# Altium PCB 水表通用工装一版PCB.PcbDoc (part 1 of 2)
Units mm, origin at the board's own origin, x right, y up, seen from the top; angles counter-clockwise.
Board outline 56.13 x 113.41 mm, 2 copper layers (Top Layer, Bottom Layer); 164 components, 131 nets, 500 pads, 301 vias.
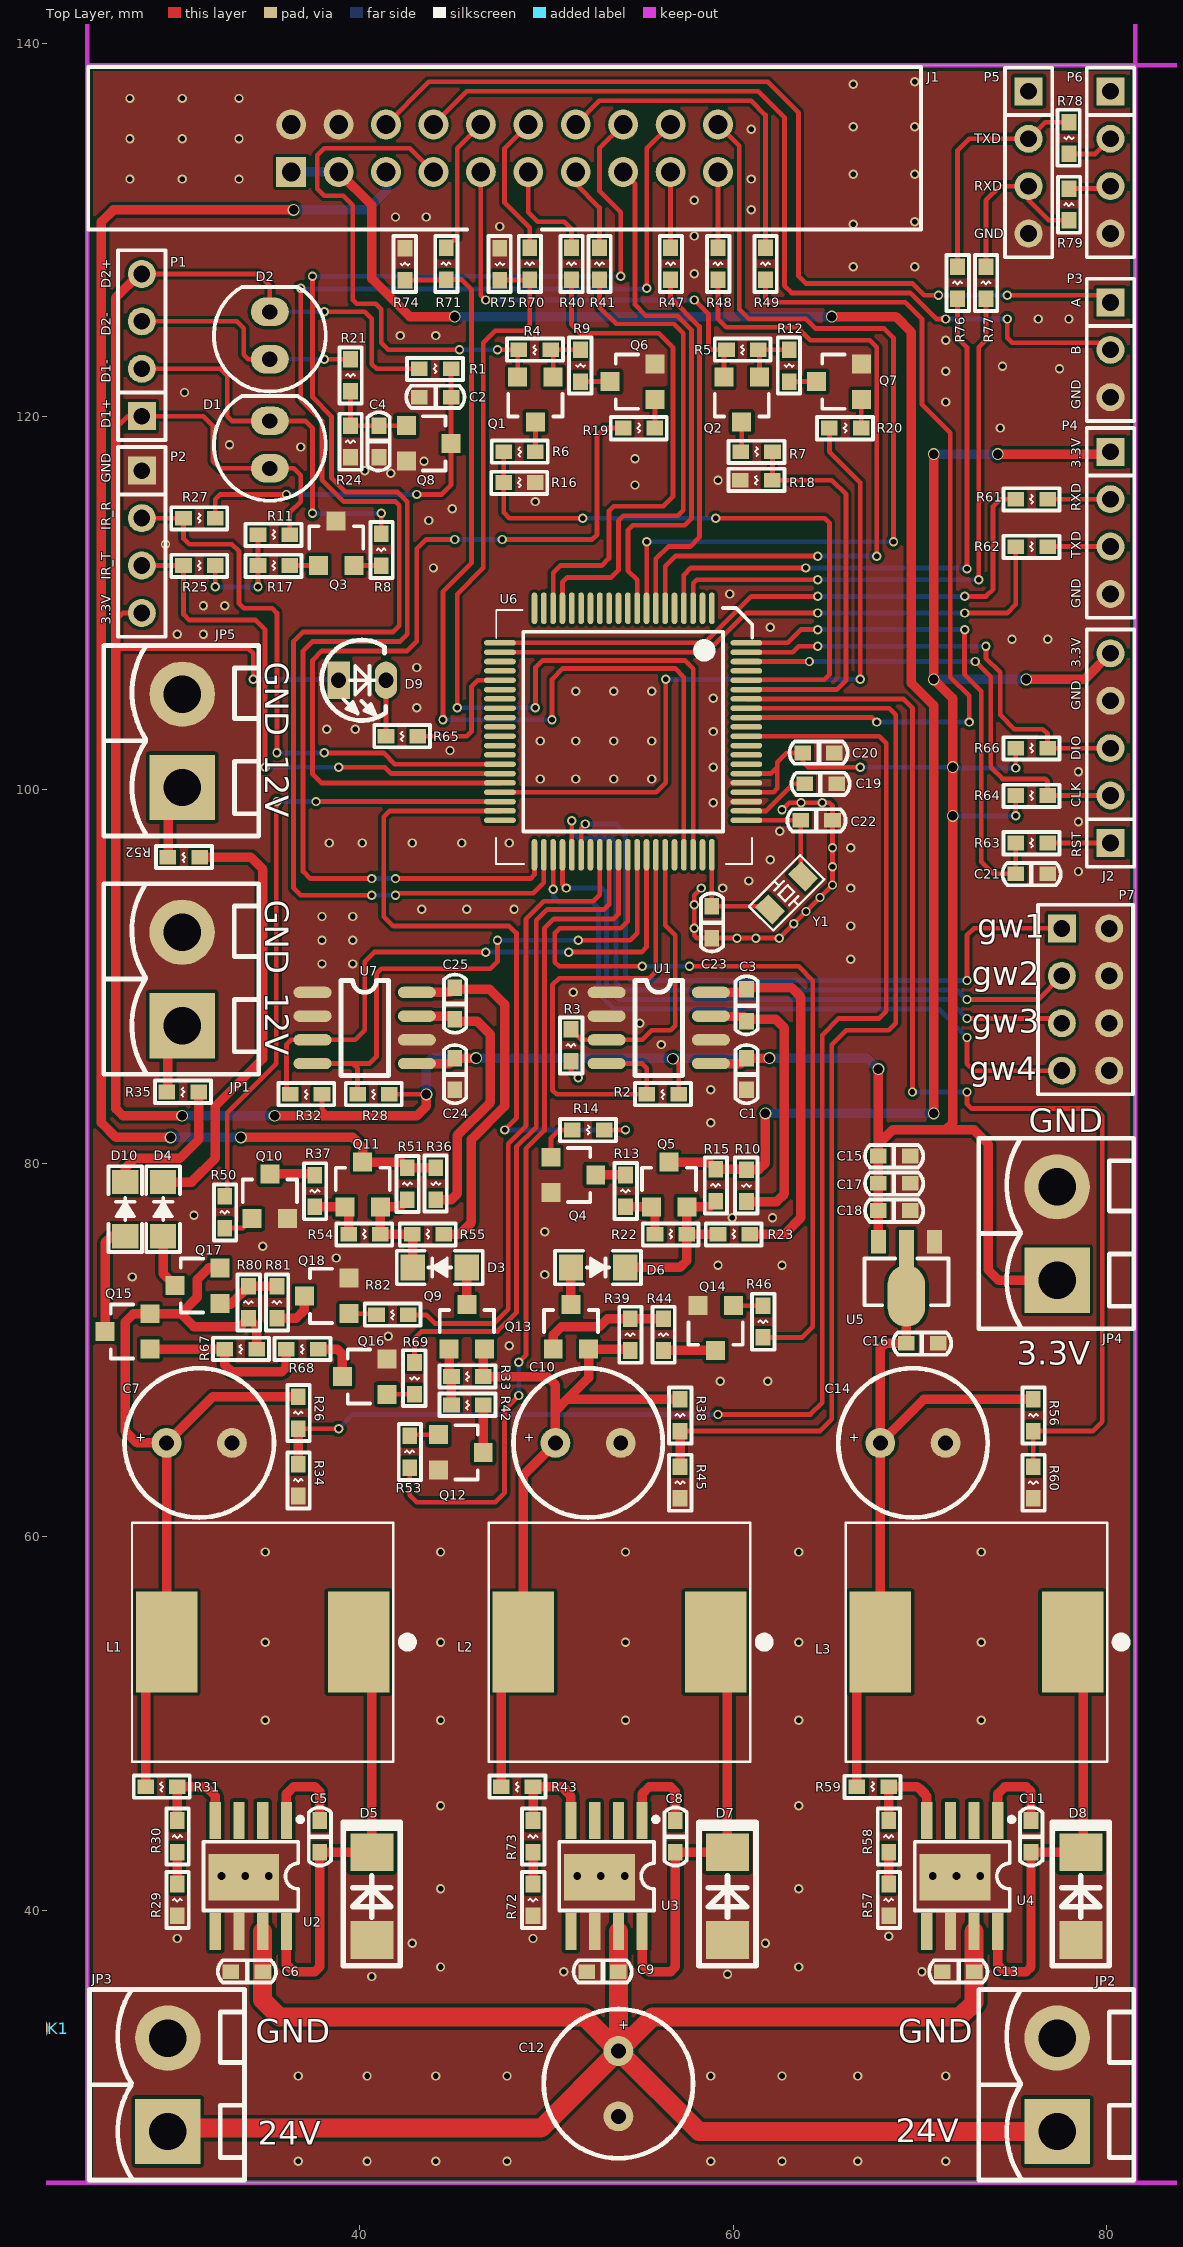
[diagram p0: Top Layer view]
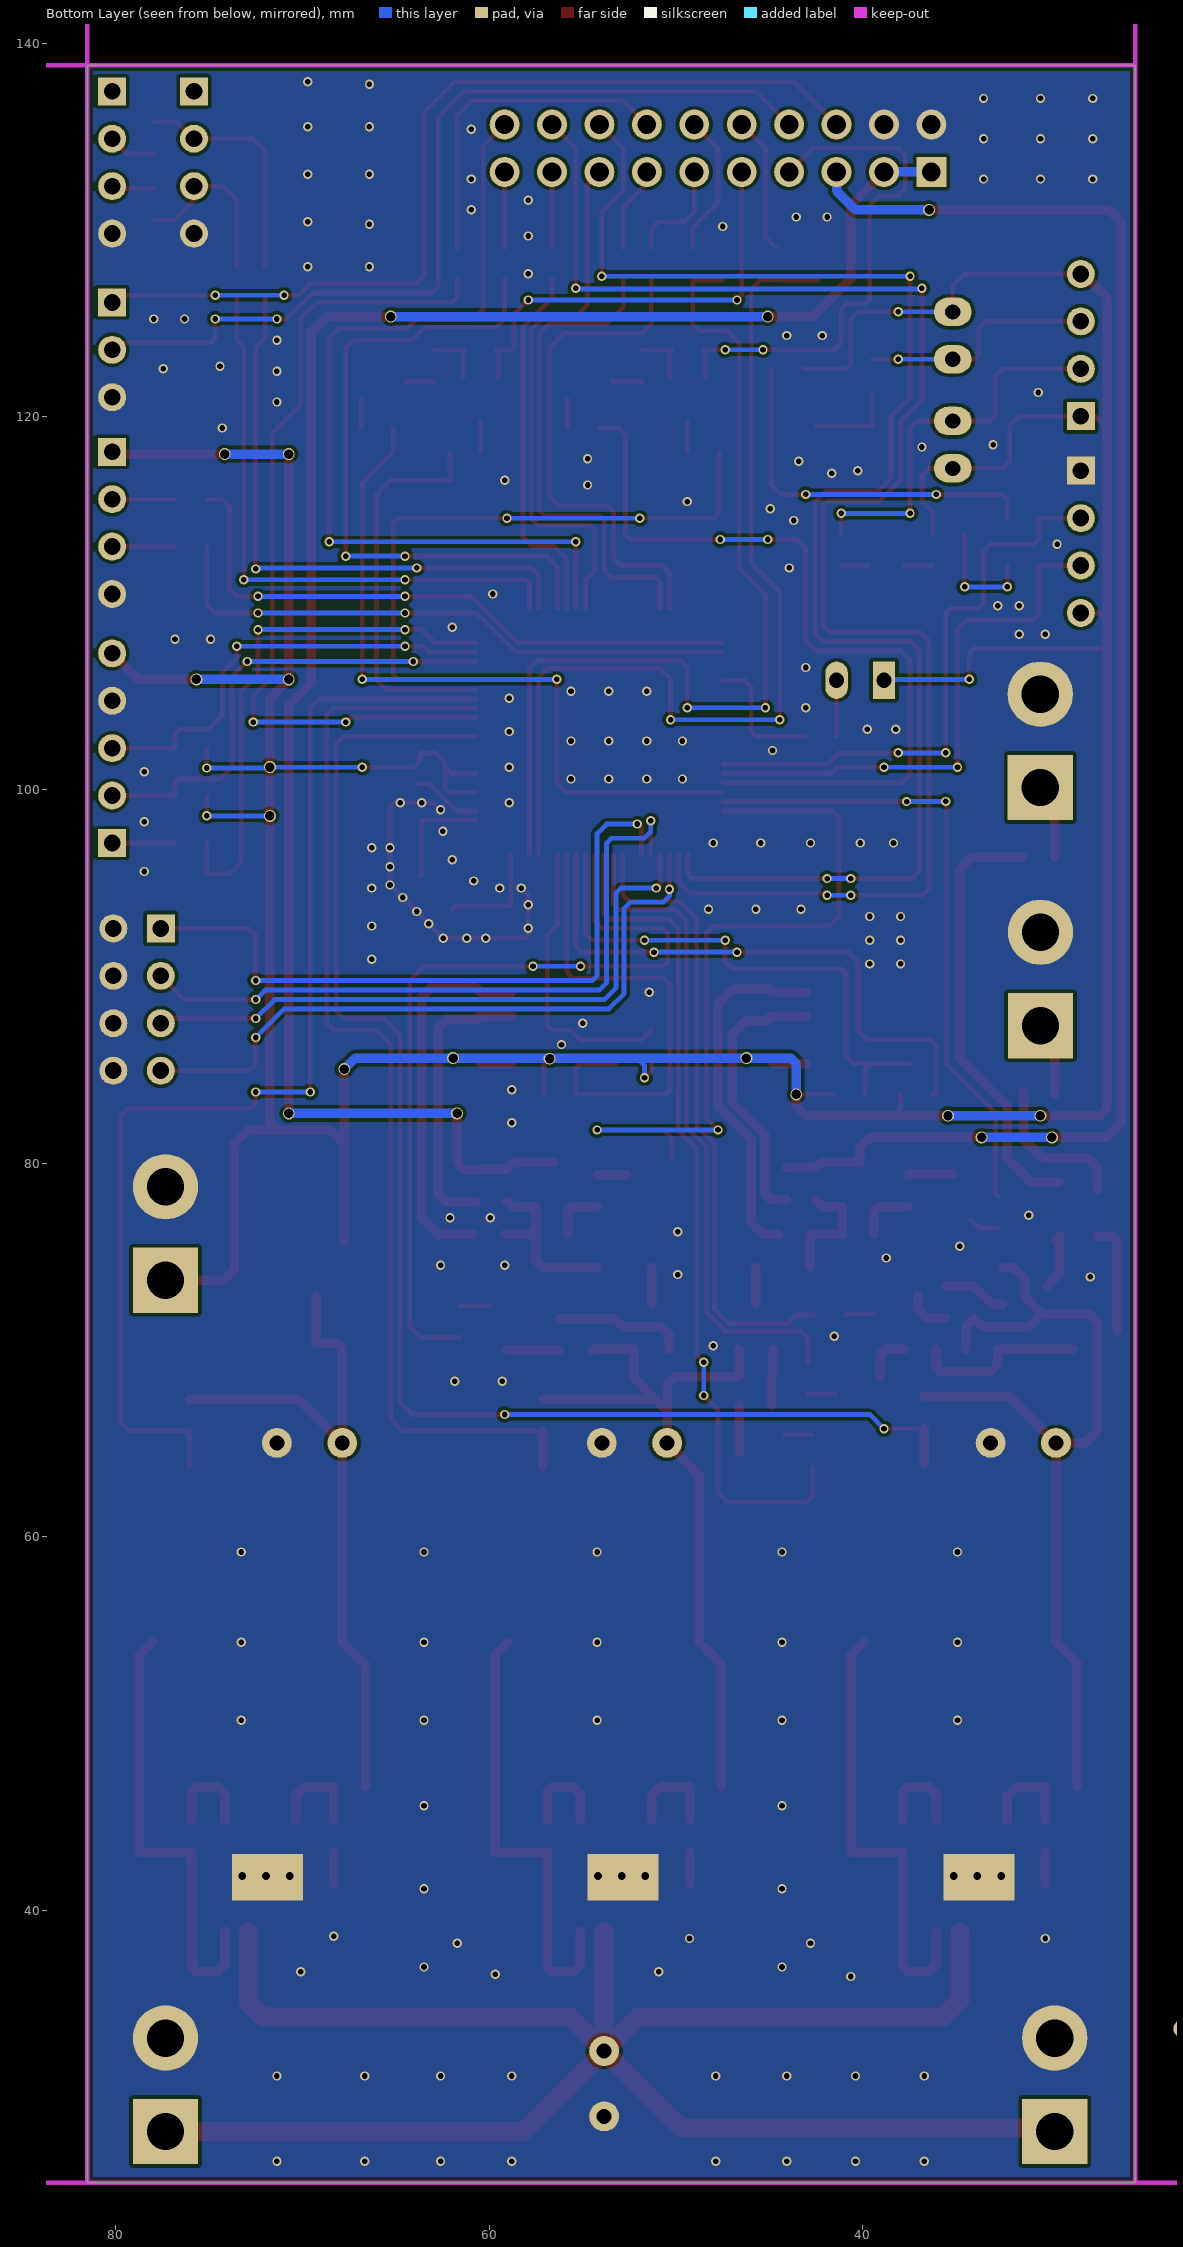
[diagram p1: Bottom Layer view, seen from below]

## Layer stack, top to bottom
Top Solder: solder mask 0.0102, Solder Resist, Dk 3.5
Top Layer: signal copper 0.0356
Dielectric 1: dielectric 0.32, FR-4, Dk 4.8
Bottom Layer: signal copper 0.0356
Bottom Solder: solder mask 0.0102, Solder Resist, Dk 3.5

## Board outline
25.4,25.4 25.4,138.811 81.534,138.811 81.534,25.4

## Design rules (kind name [scope] priority, off if disabled: settings)
Clearance [All] p1: gap=0.178 ignorepadtopadclearanceinfootprint=FALSE except(0: Arc-Hole Track-Hole SMDPad-Hole THPad-Hole Via-Hole Fill-Hole Poly-Hole Region-Hole Text-Hole)
PolygonConnect [All] p1: connectstyle=Direct reliefconductorwidth=0.254 reliefentries=4 polygonreliefangle="90 Angle" airgapwidth=0.254
RoutingVias [All] p1: holewidth=0.711 width=1.27 viastyle="Through Hole" minholewidth=0.711 minwidth=1.27 maxholewidth=0.711 maxwidth=1.27
SilkToSilkClearance [All] p1: silktosilkclearance=0
SilkToSolderMaskClearance [IsPad] p1: minsilkscreentomaskgap=0 clearancetoexposedcopper=TRUE
SolderMaskExpansion [All] p1: expansion=0.102
Width [All] p1: maxlimit=1.143 minlimit=0.254 preferedwidth=0.254
28 further rules are at their usual default settings.

## Classes and differential pairs
component class 水表通用工装一版1: C1 C2 C3 C4 C5 C6 C7 C8 C9 C10 C11 C12 C13 C14 C15 C16 C17 C18 C24 C25 D1 D2 D3 D4 D5 D6 D7 D8 D10 J1 JP1 JP2 JP3 JP4 JP5 L1 L2 L3 P1 P2 P3 P4 P5 P6 Q1 Q2 Q3 Q4 Q5 Q6 Q7 Q8 Q9 Q10 Q11 Q12 Q13 Q14 Q15 Q16 Q17 Q18 R1 R2 R3 R4 R5 R6 R7 R8 R9 R10 R11 R12 R13 R14 R15 R16 R17 R18 R19 R20 R21 R22 R23 R24 R25 R26 R27 R28 R29 R30 R31 R32 R33 R34 R35 R36 R37 R38 R39 R40 R41 R42 R43 R44 R45 R46 R47 R48 R49 R50 R51 R52 R53 R54 R55 R56 R57 R58 R59 R60 R61 R62 R67 R68 R69 R70 R71 R72 R73 R74 R75 R76 R77 R78 R79 R80 R81 R82 U1 U2 U3 U4 U5 U7
component class 水表通用工装一版2: C19 C20 C21 C22 C23 D9 J2 MARK1 MARK2 MARK3 MARK4 P7 R63 R64 R65 R66 U6 Y1

## Components (designator, comment, footprint, x,y, rotation, side; value= is the part's Value field where it differs from the comment)
C1 "100nF/50V" CAP0603 60.706,83.947 r90 top
C2 "100pF/50V" CAP0603 44.876,121.031 r180 top
C3 "100nF/50V" CAP0603 60.706,87.63 r90 top
C4 "10pF/50V" CAP0603 41.021,119.495 r270 top
C5 "10N/50V" CAP0603 37.846,43.113 r90 top
C6 "100N/50V" CAP0603 34.786,36.703 r180 top
C7 "1000uF/16V" CAPPC_350_800_1600 29.648,65.024 r0 top
C8 "10N/50V" CAP0603 56.896,43.113 r90 top
C9 "100N/50V" CAP0603 53.836,36.703 r180 top
C10 "1000uF/16V" CAPPC_350_800_1600 50.475,65.024 r0 top
C11 "10N/50V" CAP0603 75.946,43.113 r90 top
C12 "1000uF/16V" CAPPC_350_800_1600 53.848,32.456 r270 top
C13 "100N/50V" CAP0603 72.886,36.703 r180 top
C14 "1000uF/16V" CAPPC_350_800_1600 67.875,65.024 r0 top
C15 "10uF/10V" CAP0603 67.784,80.391 r0 top
C16 "100nF/50V" CAP0603 69.284,70.358 r0 top
C17 "100N/50V" CAP0603 67.784,78.93 r0 top
C18 "22pF/50V" CAP0603 67.784,77.47 r0 top
C19 "100nF/50V" CAP0603 63.843,100.33 r0 top
C20 "100nF/50V" CAP0603 65.405,101.981 r180 top
C21 "33pF/50V" CAP0603 75.146,95.504 r0 top
C22 "12pF/50V" CAP0603 63.627,98.374 r0 top
C23 "12pF/50V" CAP0603 58.852,92.075 r90 top
C24 "100nF/50V" CAP0603 45.085,83.947 r90 top
C25 "100nF/50V" CAP0603 45.085,87.719 r90 top
D1 "AT205" AT205/405 35.179,118.491 r270 top
D2 "AT405" AT205/405 35.179,124.333 r270 top
D3 "DSK36" SOD-123FL 45.804,74.422 r180 top
D4 "DSK36" SOD-123FL 29.464,76.02 r90 top
D5 "B340A-SMA" DO-214AC 40.64,40.751 r90 top
D6 "DSK36" SOD-123FL 51.234,74.422 r0 top
D7 "B340A-SMA" DO-214AC 59.69,40.751 r90 top
D8 "B340A-SMA" DO-214AC 78.613,40.751 r90 top
D9 "LED_T3R" LED2_300 38.862,105.874 r90 top
D10 "DSK36" SOD-123FL 27.432,76.02 r90 top
J1 "DC254_2*10" DC254_2*10 47.752,134.366 r90 top
J2 "PIN254_1*5*WXHJ" PIN254_1*5*1100S 80.2,97.155 r90 top
JP1 "KF129_508_2" KF129_508_2 30.48,87.376 r90 top
JP2 "KF129_508_2" KF129_508_2 77.343,28.147 r90 top
JP3 "KF129_508_2" KF129_508_2 29.718,28.147 r90 top
JP4 "KF129_508_2" KF129_508_2 77.343,73.74 r90 top
JP5 "KF129_508_2" KF129_508_2 30.489,100.128 r90 top
L1 "LQS1260M2200_47uH" LQS1212 34.798,54.356 r180 top
L2 "LQS1260M2200_47uH" LQS1212 53.911,54.356 r180 top
L3 "LQS1260M2200_47uH" LQS1212 73.025,54.356 r180 top
MARK1 "MARK" MARK 22.86,33.655 r90 top
MARK2 "MARK" MARK 196.342,243.967 r90 top
MARK3 "MARK" MARK 196.342,33.655 r90 top
MARK4 "MARK" MARK 22.86,243.967 r90 top
P1 "PIN254_1*4*WXHJ" PIN254_1*4*1100S 28.321,120.015 r90 top
P2 "PIN254_1*4*WXHJ" PIN254_1*4*1100S 28.321,117.094 r270 top
P3 "PIN254_1*3*WXHJ" "PIN254_1*3*1100S - duplicate" 80.2,126.111 r270 top
P4 "PIN254_1*4*WXHJ" PIN254_1*4*1100S 80.2,118.11 r270 top
P5 "PIN254_1*4*WXHJ" PIN254_1*4*1100S 75.819,137.414 r270 top
P6 "PIN254_1*4*WXHJ" PIN254_1*4*1100S 80.2,137.414 r270 top
P7 "Header 4X2" HDR2X4 77.597,92.583 r270 top
Q1 "PNPS-9012" SOT-23 49.403,120.904 r180 top
Q2 "PNPS-9012" SOT-23 60.452,120.904 r180 top
Q3 "PNPS-9012" SOT-23 38.735,113.214 r0 top
Q4 "NPNS-9013" SOT-23 51.435,79.375 r270 top
Q5 "RZR040P01TL" SOT-23 56.56,78.867 r0 top
Q6 "NPNS-9013" SOT-23 54.61,121.869 r90 top
Q7 "NPNS-9013" SOT-23 65.659,121.869 r90 top
Q8 "NPNS-9013" SOT-23 43.688,118.557 r270 top
Q9 "RZR040P01TL" SOT-23 45.73,71.247 r0 top
Q10 "NPNS-9013" SOT-23 35.179,78.232 r0 top
Q11 "RZR040P01TL" SOT-23 40.153,78.867 r0 top
Q12 "NPNS-9013" SOT-23 45.409,64.516 r270 top
Q13 "RZR040P01TL" SOT-23 51.308,71.247 r0 top
Q14 "NPNS-9013" SOT-23 59.055,71.177 r180 top
Q15 "UT3401ZG" SOT-23 27.559,70.993 r90 top
Q16 "NPNS-9013" SOT-23 40.259,68.58 r90 top
Q17 "UT3401ZG" SOT-23 31.301,73.454 r90 top
Q18 "NPNS-9013" SOT-23 38.227,72.898 r90 top
R1 "20K 5%" RES0603 43.186,122.555 r0 top
R2 "10K 5%" RES0603 57.074,83.693 r180 top
R3 "10K 5%" RES0603 51.308,85.471 r90 top
R4 "100K 5%" RES0603 50.216,123.571 r180 top
R5 "100K 5%" RES0603 61.341,123.571 r180 top
R6 "100K 5%" RES0603 49.403,118.11 r180 top
R7 "100K 5%" RES0603 60.401,118.11 r0 top
R8 "100R 5%" RES0603 41.148,112.014 r90 top
R9 "10K 1%" RES0603 51.816,123.571 r270 top
R10 "10R 5%" RES0603 60.706,79.654 r270 top
R11 "20K 5%" RES0603 34.544,113.665 r0 top
R12 "10K 1%" RES0603 62.992,123.571 r270 top
R13 "200K 5%" RES0603 54.229,77.673 r90 top
R14 "1K 5%" RES0603 51.384,81.788 r0 top
R15 "100R 1%" RES0603 59.055,77.978 r90 top
R16 "10K 5%" RES0603 47.701,116.459 r0 top
R17 "3K 5%" RES0603 34.544,112.014 r0 top
R18 "10K 5%" RES0603 62.078,116.586 r180 top
R19 "1K 5%" RES0603 54.102,119.38 r0 top
R20 "1K 5%" RES0603 65.151,119.38 r0 top
R21 "20K 5%" RES0603 39.497,121.361 r90 top
R22 "2M 5%" RES0603 55.808,76.2 r0 top
R23 "10R 5%" RES0603 59.182,76.2 r0 top
R24 "47K 5%" RES0603 39.497,117.805 r90 top
R25 "0R 5%" RES0603 30.556,112.014 r0 top
R26 "100K 5%" RES0603 36.703,65.786 r90 top
R27 "0R 5%" RES0603 30.556,114.554 r0 top
R28 "10K 5%" RES0603 41.58,83.693 r180 top
R29 "1K 5%" RES0603 30.226,39.7 r90 top
R30 "10K 5%" RES0603 30.226,43.1 r90 top
R31 "100K 5%" RES0603 30.226,46.609 r180 top
R32 "10K 5%" RES0603 37.973,83.693 r180 top
R33 "2M 5%" RES0603 46.609,68.58 r180 top
R34 "10K 5%" RES0603 36.703,62.179 r90 top
R35 "51R 5%" RES0603 31.369,83.82 r180 top
R36 "10R 5%" RES0603 44.069,79.756 r270 top
R37 "200K 5%" RES0603 37.592,77.667 r90 top
R38 "100K 5%" RES0603 57.15,65.659 r90 top
R39 "2M 5%" RES0603 54.483,69.977 r90 top
R40 "100R 1%" RES0603 51.333,127.33 r90 top
R41 "100R 1%" RES0603 52.832,127.33 r90 top
R42 "200K 5%" RES0603 46.609,67.056 r180 top
R43 "10K 5%" RES0603 49.276,46.609 r180 top
R44 "200K 5%" RES0603 56.261,69.977 r90 top
R45 "10K 5%" RES0603 57.15,62.052 r90 top
R46 "1K 5%" RES0603 61.595,70.675 r90 top
R47 "1K 5%" RES0603 56.642,127.33 r90 top
R48 "1K 5%" RES0603 59.182,127.33 r90 top
R49 "1K 5%" RES0603 61.722,127.33 r90 top
R50 "1K 5%" RES0603 32.766,76.53 r90 top
R51 "100R 1%" RES0603 42.545,78.054 r90 top
R52 "51R 5%" RES0603 31.42,96.393 r180 top
R53 "1K 5%" RES0603 42.672,63.703 r90 top
R54 "2M 5%" RES0603 39.401,76.2 r0 top
R55 "10R 5%" RES0603 42.799,76.2 r0 top
R56 "100K 5%" RES0603 76.073,65.659 r90 top
R57 "20K 5%" RES0603 68.326,39.7 r90 top
R58 "10K 5%" RES0603 68.326,43.1 r90 top
R59 "100K 5%" RES0603 66.624,46.609 r0 top
R60 "10K 5%" RES0603 76.073,62.052 r90 top
R61 "1K 5%" RES0603 75.133,115.57 r0 top
R62 "1K 5%" RES0603 75.133,113.03 r0 top
R63 "100R 5%" RES0603 75.133,97.155 r0 top
R64 "10K 5%" RES0603 75.133,99.695 r0 top
R65 "1K 5%" RES0603 43.104,102.87 r180 top
R66 "10K 5%" RES0603 75.133,102.235 r0 top
R67 "2M 5%" RES0603 34.468,70.043 r180 top
R68 "200K 5%" RES0603 37.77,70.043 r180 top
R69 "1K 5%" RES0603 42.926,69.332 r270 top
R70 "100K 5%" RES0603 49.098,127.33 r90 top
R71 "100K 5%" RES0603 44.628,127.33 r90 top
R72 "220R 5%" RES0603 49.276,39.7 r90 top
R73 "4.7K 5%" RES0603 49.276,43.1 r90 top
R74 "10K 5%" RES0603 42.418,129.007 r270 top
R75 "10K 5%" RES0603 47.498,129.007 r270 top
R76 "1K 5%" RES0603 72.009,126.314 r90 top
R77 "1K 5%" RES0603 73.533,126.314 r90 top
R78 "22R 5%" RES0603 77.978,135.763 r270 top
R79 "22R 5%" RES0603 77.978,130.505 r90 top
R80 "2M 5%" RES0603 34.036,71.704 r90 top
R81 "200K 5%" RES0603 35.56,71.704 r90 top
R82 "1K 5%" RES0603 42.596,71.882 r180 top
U1 "ina219" SO-8 53.213,89.154 r0 top
U2 "TPS5430DDA" SOP-8-P 36.068,44.802 r270 top
U3 "TPS5430DDA" SOP-8-P 55.118,44.802 r270 top
U4 "TPS5430DDA" SOP-8-P 74.168,44.802 r270 top
U5 "CE6232A33P" SOT-89 69.272,74.898 r180 top
U6 "FM33LG0x8" LQFP80 54.102,103.124 r270 top
U7 "ina219" SO-8 37.465,89.154 r0 top
Y1 "32.768kD" SMD-3215_2P 63.744,95.367 r225 top

## Footprints (in the part's own frame and the unit in brackets; to place one, negate y for a bottom-side part, rotate by r counter-clockwise, add the part's x,y. Pads: shape width x height; smd on the part's side, far side on the other; paste and mask are expansions set on the pad)
AT205/405 [mil]
  oval 60x80 hole 32: 1(50,0) 2(-50,0)
  silkscreen extent -102,-118 118,118
CAP0603 [mil]
  rect 35x31 smd: 1(-0.49,0) 2(66.51,0)
  silkscreen extent -29,-24 94,23, body extent 1,-15 72,15, height 20
CAPPC_350_800_1600 [mm]
  round 1.6 hole 0.8: 1(0,0) 2(3.5,0)
  silkscreen extent -2.25,-4 5.75,4, body extent -2.26,-4 5.75,4, height 15.11
DC254_2*10 [mm]
  rect 1.6x1.6 hole 1: 1(-1.27,11.43)
  round 1.6 hole 1: 2(1.27,11.43) 3(-1.27,8.89) 4(1.27,8.89) 5(-1.27,6.35) 6(1.27,6.35) 7(-1.27,3.81) 8(1.27,3.81) 9(-1.27,1.27) 10(1.27,1.27) 11(-1.27,-1.27) 12(1.27,-1.27) 13(-1.27,-3.81) 14(1.27,-3.81) 15(-1.27,-6.35) 16(1.27,-6.35) 17(-1.27,-8.89) 18(1.27,-8.89) 19(-1.27,-11.43) 20(1.27,-11.43)
  silkscreen extent -4.35,-22.3 4.35,22.3
DO-214AC [mil]
  rect 80x90.55 smd: 1(-92.5,0) 2(92.5,0)
  silkscreen extent -146,-60 156,60, body extent -91,-53 90,53, height 94
HDR2X4 [mm] "Connector; Header; 4x2 Position"
  rect 1.5x1.5 hole 0.9: 1(0,0)
  round 1.5 hole 0.9: 2(0,2.54) 3(2.54,0) 4(2.54,2.54) 5(5.08,0) 6(5.08,2.54) 7(7.62,0) 8(7.62,2.54)
  silkscreen extent -1.27,-1.27 8.89,3.81
KF129_508_2 [mm]
  rect 3.5x3.5 hole 2: 1(0,0)
  round 3.5 hole 2: 2(5,0)
  silkscreen extent -2.6,-4.1 7.6,4.2
LED2_300 [mm]
  rect 2x1.2 hole 0.813: 1(0,0)
  oval 2x1.2 hole 0.813: 2(0,-2.54)
  silkscreen extent -2.16,-2.53 2.16,0.91, body extent -1.65,-2.91 1.64,0.39, height 5.51
LQFP80 [mm]
  oval 1.7x0.3 smd: 1(-6.6,4.75) 2(-6.6,4.25) 3(-6.6,3.75) 4(-6.6,3.25) 5(-6.6,2.75) 6(-6.6,2.25) 7(-6.6,1.75) 8(-6.6,1.25) 9(-6.6,0.75) 10(-6.6,0.25) 11(-6.6,-0.25) 12(-6.6,-0.75) 13(-6.6,-1.25) 14(-6.6,-1.75) 15(-6.6,-2.25) 16(-6.6,-2.75) 17(-6.6,-3.25) 18(-6.6,-3.75) 19(-6.6,-4.25) 20(-6.6,-4.75) 41(6.6,-4.75) 42(6.6,-4.25) 43(6.6,-3.75) 44(6.6,-3.25) 45(6.6,-2.75) 46(6.6,-2.25) 47(6.6,-1.75) 48(6.6,-1.25) 49(6.6,-0.75) 50(6.6,-0.25) 51(6.6,0.25) 52(6.6,0.75) 53(6.6,1.25) 54(6.6,1.75) 55(6.6,2.25) 56(6.6,2.75) 57(6.6,3.25) 58(6.6,3.75) 59(6.6,4.25) 60(6.6,4.75)
  oval 0.3x1.7 smd: 21(-4.75,-6.6) 22(-4.25,-6.6) 23(-3.75,-6.6) 24(-3.25,-6.6) 25(-2.75,-6.6) 26(-2.25,-6.6) 27(-1.75,-6.6) 28(-1.25,-6.6) 29(-0.75,-6.6) 30(-0.25,-6.6) 31(0.25,-6.6) 32(0.75,-6.6) 33(1.25,-6.6) 34(1.75,-6.6) 35(2.25,-6.6) 36(2.75,-6.6) 37(3.25,-6.6) 38(3.75,-6.6) 39(4.25,-6.6) 40(4.75,-6.6) 61(4.75,6.6) 62(4.25,6.6) 63(3.75,6.6) 64(3.25,6.6) 65(2.75,6.6) 66(2.25,6.6) 67(1.75,6.6) 68(1.25,6.6) 69(0.75,6.6) 70(0.25,6.6) 71(-0.25,6.6) 72(-0.75,6.6) 73(-1.25,6.6) 74(-1.75,6.6) 75(-2.25,6.6) 76(-2.75,6.6) 77(-3.25,6.6) 78(-3.75,6.6) 79(-4.25,6.6) 80(-4.75,6.6)
  silkscreen extent -6.62,-6.81 7.1,6.91, body extent -5.33,-5.33 5.36,5.33, height 2
LQS1212 [mm]
  rect 3.3x5.4 smd: 1(-5.15,0) 2(5.15,0)
  silkscreen extent -8,-6.4 7,6.4, body extent -6.35,-6.1 6.35,6.1, height 6
MARK [mm]
  round 1 smd: 0(0,0)
  round 1 smd far side: 1(0,0)
  Top Layer pour cut-out: -1.5,0 -1.5,-0.148 -1.442,-0.438 -1.329,-0.711 -1.165,-0.956 -0.956,-1.165 -0.711,-1.329 -0.438,-1.442 -0.148,-1.5 0,-1.5 0.148,-1.5 0.438,-1.442 0.711,-1.329 0.956,-1.165 1.165,-0.956 1.329,-0.711 1.442,-0.438 1.5,-0.148 1.5,0 1.5,0.148 1.442,0.438 1.329,0.711 1.165,0.956 0.956,1.165 0.711,1.329 0.438,1.442 0.148,1.5 0,1.5 -0.148,1.5 -0.438,1.442 -0.711,1.329 -0.956,1.165 -1.165,0.956 -1.329,0.711 -1.442,0.438 -1.5,0.148 -1.5,0
  Bottom Layer pour cut-out: -1.5,0 -1.5,-0.148 -1.442,-0.438 -1.329,-0.711 -1.165,-0.956 -0.956,-1.165 -0.711,-1.329 -0.438,-1.442 -0.148,-1.5 0,-1.5 0.148,-1.5 0.438,-1.442 0.711,-1.329 0.956,-1.165 1.165,-0.956 1.329,-0.711 1.442,-0.438 1.5,-0.148 1.5,0 1.5,0.148 1.442,0.438 1.329,0.711 1.165,0.956 0.956,1.165 0.711,1.329 0.438,1.442 0.148,1.5 0,1.5 -0.148,1.5 -0.438,1.442 -0.711,1.329 -0.956,1.165 -1.165,0.956 -1.329,0.711 -1.442,0.438 -1.5,0.148 -1.5,0
"PIN254_1*3*1100S - duplicate" [mm] "Connector; Header; 4 Position"
  rect 1.5x1.5 hole 0.9: 1(0,0)
  round 1.5 hole 0.9: 2(2.54,0) 3(5.08,0)
  silkscreen extent -1.27,-1.27 6.35,1.27
PIN254_1*4*1100S [mm] "Connector; Header; 4 Position"
  rect 1.5x1.5 hole 0.9: 1(0,0)
  round 1.5 hole 0.9: 2(2.54,0) 3(5.08,0) 4(7.62,0)
  silkscreen extent -1.27,-1.27 8.89,1.27, body extent -1.3,-1.3 8.86,1.24, height 8.54
PIN254_1*5*1100S [mm]
  rect 1.5x1.5 hole 0.9: 1(0,0)
  round 1.5 hole 0.9: 2(2.54,0) 3(5.08,0) 4(7.62,0) 5(10.16,0)
  silkscreen extent -1.27,-1.27 11.43,1.27
RES0603 [mil]
  rect 35x31 smd: 1(0,0) 2(67,0)
  silkscreen extent -26,-24 92,23, body extent 0,-15 71,15, height 12
SMD-3215_2P [mm]
  rect 1x1.3 smd: 1(0,0) 2(2.5,0)
  silkscreen extent -0.69,-0.91 3.19,0.91, body extent -0.3,-0.99 2.9,0.99, height 0.7
SO-8 [mil]
  oval 80x24 smd: 1(0,0) 2(0,-50) 3(0,-100) 4(0,-150) 5(220,-150) 6(220,-100) 7(220,-50) 8(220,0)
  silkscreen extent 60,-175 160,25, body extent -7,-171 229,21, height 67
SOD-123FL [mm]
  rect 1.3x1.4 smd: 1(0.074,0) 2(2.974,0)
  silkscreen extent -0.78,-0.9 3.82,0.9, body extent -0.28,-0.82 3.32,0.82, height 0.95
SOP-8-P [mm]
  rect 2x0.6 smd: 1(0,0) 2(0,-1.27) 3(0,-2.54) 4(0,-3.81) 5(5.94,-3.81) 6(5.94,-2.54) 7(5.94,-1.27) 8(5.94,0)
  rect 2.5x3.8 smd: 9(3.048,-2.286)
  rect 2.5x3.8 smd far side: 9(3.048,-2.286)
  silkscreen extent -0.18,-4.44 4.83,0.86, body extent 0.38,-4.57 5.72,0.76, height 1.8
SOT-23 [mil]
  rect 40x40 smd: 1(-37.4,-47.24) 2(37.4,-47.24) 3(0,47.24)
  silkscreen extent -57,-12 57,35, body extent -57,-55 57,55, height 47
SOT-89 [mm]
  rect 0.8x1.27 smd: 1(-1.5,-0.9) 3(1.5,-0.9)
  oval 2x3.3 smd: 2(0,2)
  rect 0.8x2.54 smd: 2(0,-0.265)
  silkscreen extent -2.25,0 2.25,2.5, body extent -2.25,-1.02 2.25,2.92, height 1.4

## Part data
C1 C3 C16 C19 C20 C24 C25: library part 101020103-0021, "104pF,50 V,±10%,0603,国巨,CC0603KRX7R9BB104", Part Name=0603贴片电容, ID=3, Part Number=101020103-0021, SMD/DIP=SMD
C2: library part 101020103-0010, "101pf,50 V,±5%,0603,国巨,CC0603JRNP09BN101", Part Name=0603贴片电容, ID=4, Part Number=101020103-0010, SMD/DIP=SMD
C4: library part 101020103-0014, "10pF,50 V,±5%,0603,X7R,国巨,CC0603JRNPO9BN100", Part Name=0603贴片电容, ID=7, Part Number=101020103-0014, SMD/DIP=SMD
C5 C8 C11: library part 101020103-0007, "10N/50V，±10%，0603", Part Name=0603贴片电容, ID=35, Part Number=101020103-0007
C6 C9 C13 C17: library part 101020103-0021, "100N/50V，±10%，0603", Part Name=0603贴片电容, ID=34, Part Number=101020103-0021
C7 C10 C12 C14: library part 1010203-0029, "1000uF,16 V,±20%,8*20mm,Rubycon,16ZLH1000M", Part Name=电解电容, ID=2, Part Number=1010203-0029, SMD/DIP=DIP
C15: library part 101020103-0026, "106pF,10 V,±10%,0603,村田,GRM188R61A106KE47D", Part Name=0603贴片电容, ID=8, Part Number=101020103-0026, SMD/DIP=SMD
C18: library part 101020103-0009, "22pF,50 V,±5%,0603,国巨,CC0603JRNPO9BN22", Part Name=0603贴片电容, ID=16, Part Number=101020103-0009, SMD/DIP=SMD
C21: library part 101020103-0027, "33pF,50 V,±10%,0603,国巨,CC0603KRNPO9BN33", Part Name=0603贴片电容, ID=17, Part Number=101020103-0027, SMD/DIP=SMD
C22 C23: library part 101020103-0005, "12P,50 V,±5%,0603,国巨,CC0603JRNPO9BN12", Part Name=0603贴片电容, ID=11, Part Number=101020103-0005, SMD/DIP=SMD
D2: library part 6, "红外接收头，插件，红光，AT405_PD_01", Manufacturer=品观, Part Name=红外接收管, Part Number=101040102-0011, ID=6, SMD/DIP=DIP
D3 D4 D6 D10: library part 101040101-0043, "DSK14,SOD-123FL,1 A,40 V,28 V,台湾强茂集团苏州群鑫电子,DSK14", Part Name=二极管, ID=10, Part Number=101040101-0043, SMD/DIP=SMD
D5 D7 D8: library part 101040101-0014, Part Name=贴片肖特基, ID=24, Part Number=101040101-0014
D9: library part 101040102-0001, "圆形插件,3mm 圆形,插件,红光,湖北匡通电子有限公司,3BB4HC", Part Name=发光二极管, ID=6, Part Number=101040102-0001, SMD/DIP=DIP
J1: library part 1010902-0139, "DC2 2.54mm 2x10pin,2.54mm间距，2x10pin，32×8.55×27.5mm,母头,双排,双排牛角座", Part Name=DC牛角座, ID=4, Part Number=1010902-0139, SMD/DIP=DIP
J2: library part AD_WXHJ_PinHeader_02, "1*5 ，Φ1.0 ，2.54mm，直脚,无需焊接器件", Part Name=排针, ID=17, Part Number=AD_WXHJ_PinHeader_02, SMD/DIP=DIP
JP1 JP2 JP3 JP4 JP5: library part 1010904-0015, "KF129-2P,螺丝紧固,2,ABS,松涛", Part Name=接线端子, ID=7, Part Number=1010904-0015, SMD/DIP=DIP
L1 L2 L3: library part 1010302-0007, "47uH/2.2A,±20%，0.072Ω，L1200X1200X600", Part Name=贴片电感, ID=3, Part Number=1010302-0007
MARK1 MARK2 MARK3 MARK4: library part AD_WXHJ_MARK_01, "MARK点", ID=8, Part Name=MARK点, Part Number=AD_WXHJ_MARK_01, SMD/DIP=SMD
P1 P2 P4 P5 P6: library part AD_WXHJ_PinHeader_01, "1*4 ，Φ1.0 ，2.54mm，直脚,无需焊接器件", Part Name=排针, ID=16, Part Number=AD_WXHJ_PinHeader_01, SMD/DIP=DIP
P3: library part AD_WXHJ_PinHeader_01, "1*3 ，Φ1.0 ，2.54mm，直脚,无需焊接器件", Part Name=排针, ID=16, Part Number=AD_WXHJ_PinHeader_01, SMD/DIP=DIP
P7: "Header, 4-Pin, Dual row"
Q1 Q2 Q3: library part 101040201-0001, "9012,PNP,SOT-23,JCET;长电,S9012", Part Name=贴片三极管, ID=17, Part Number=101040201-0001, SMD/DIP=SMD
Q4 Q6 Q7 Q8 Q10 Q12 Q14 Q16 Q18: library part 101040201-0002, "9013,NPN,SOT-23,长电,S9013", Part Name=贴片三极管, ID=15, Part Number=101040201-0002, SMD/DIP=SMD
Q5 Q9 Q11 Q13: library part 101040201-0010, "RZR040P01TL；1.5v导通,P-MOS,SOT-23,罗姆,RZR040P01TL", Part Name=PMOS管, ID=18, Part Number=101040201-0010, SMD/DIP=SMD
Q15 Q17: library part 101040201-0013, "UT3401ZG,P-MOS,SOT-23,UTC,UT3401ZG", Part Name=功率MOS管, ID=19, Part Number=101040201-0013, SMD/DIP=SMD
R1 R11 R21 R57: library part 101010103-0004, "国巨,±5%,0603,,155 ℃,-55 ℃,RC0603JR-0720KL,无铅,200 ppm/℃,1/10W,,20K", Part Name=0603贴片电阻, ID=15, Part Number=101010103-0004, SMD/DIP=SMD
R2 R3 R16 R18 R28 R30 R32 R34 R43 R45 R58 R60 R64 R66 R74 R75: library part 101010103-0003, "国巨,±5%,0603,,155 ℃,-55 ℃,RC0603JR-0710KL,无铅,200 ppm/℃,1/10W,,10K", Part Name=0603贴片电阻, ID=7, Part Number=101010103-0003, SMD/DIP=SMD
R4 R5 R6 R7 R31: library part 101010103-0005, "国巨,±5%,0603,,155 ℃,-55 ℃,RC0603JR-07100KL,无铅,100 ppm/℃,1/10W,,100K", Part Name=0603贴片电阻, ID=3, Part Number=101010103-0005, SMD/DIP=SMD
R8 R63: library part 101010103-0022, "100R,±5%,1/10W,0603,国巨,RC0603JR-07100RL", Part Name=0603贴片电阻, ID=5, Part Number=101010103-0022, SMD/DIP=SMD
R9 R12: library part 101010103-0052, "10K±1%,1/10W,0603", Part Name=0603贴片电阻, ID=6, Part Number=101010103-0052, SMD/DIP=SMD
R10 R23 R36 R55: library part 101010103-0017, "10R,±5%,1/10W,0603,国巨,RC0603JR-0710RL", Part Name=0603贴片电阻, ID=8, Part Number=101010103-0017, SMD/DIP=SMD
R13 R37 R42 R44 R68 R81: library part 101010103-0034, "200K,±5%,1/10W,0603,国巨,RC0603JR-07200KL", Part Name=0603贴片电阻, ID=13, Part Number=101010103-0034, SMD/DIP=SMD
R14 R19 R20 R29 R46 R47 R48 R49 R50 R53 R61 R62 R65 R69 R76 R77 R82: library part 101010103-0008, "1K,±5%,1/10W,0603,国巨,RC0603JR-071KL", Part Name=0603贴片电阻, Part Number=101010103-0008, SMD/DIP=SMD
  R14 R19 R20 R29 R46 R47 R48 R49 R50 R53 R61 R62 R69 R76 R77 R82: ID=10
  R65: ID=9
R15 R40 R41 R51: library part 101010103-0041, "100Ω,±1%,1/10W,0603,国巨股份有限公司,RC0603FR-07100RL", Part Name=0603贴片电阻, ID=4, Part Number=101010103-0041, SMD/DIP=SMD
R17: library part 101010103-0006, "国巨,±5%,0603,,155 ℃,-55 ℃,RC0603JR-073KL,无铅,100 ppm/℃,1/10W,,3K", Part Name=0603贴片电阻, ID=23, Part Number=101010103-0006, SMD/DIP=SMD
R22 R33 R39 R54 R67 R80: library part 101010103-0025, "国巨,±5%,0603,,155 ℃,-55 ℃,RC0603JR-072ML,含铅,100 ppm/℃,1/10W,,2M", Part Name=0603贴片电阻, ID=20, Part Number=101010103-0025, SMD/DIP=SMD
R24: library part 101010103-0012, "47K,±5%,1/10W,0603,国巨,RC0603JR-0747KL", Part Name=0603贴片电阻, ID=26, Part Number=101010103-0012, SMD/DIP=SMD
R25 R27: library part 101010103-0001, "国巨,±5%,0603,,155 ℃,-55 ℃,RC0603J2-070RL,无铅,200 ppm/℃,1/10W,,0R", Part Name=0603贴片电阻, ID=1, Part Number=101010103-0001, SMD/DIP=SMD
R26 R38 R56 R59 R70 R71: library part 101010103-0005, "100K±5%,1/10W,0603", Part Name=0603贴片电阻, ID=30, Part Number=101010103-0005
R35 R52: library part 101010103-0037, "国巨,±5%,0603,,155 ℃,-55 ℃,RC0603JR-0751RL,无铅,100 ppm/℃,1/10W,,51欧", Part Name=0603贴片电阻, ID=29, Part Number=101010103-0037, SMD/DIP=SMD
R72: library part 101010103-0019, "220±5%,1/10W,0603,国巨,RC0603JR-07220RL", Part Name=0603贴片电阻, ID=16, Part Number=101010103-0019, SMD/DIP=SMD
R73: library part 101010103-0042, "4.7K±5%,1/10W,0603", Part Name=0603贴片电阻, ID=24, Part Number=101010103-0042, SMD/DIP=SMD
R78 R79: library part 101010103-0009, "国巨,±5%,0603,,155 ℃,-55 ℃,RC0603JR-0722RL,无铅,200 ppm/℃,1/10W,,22欧", Part Name=0603贴片电阻, ID=18, Part Number=101010103-0009, SMD/DIP=SMD
U1 U7: library part Component_2
U2 U3 U4: library part 101050101-0053, "TPS5430DDA,SOP8,TI,TPS5430DDA", Part Name=电源芯片, ID=9, Part Number=101050101-0053, SMD/DIP=SMD
U5: library part 1010503-0029, "CE6232-3.3,CE6232-3.3,SOT89-3,8V,1.8V,0.11V,3.3V,300mA,0.8uA,南京芯力微电子有限公司", Part Name=线性稳压芯片, ID=5, Part Number=1010503-0029, SMD/DIP=SMD
Y1: library part 1010601-0009, Part Name=贴片晶振, Part Number=1010601-0020, ID=20, SMD/DIP=SMD

## Via types
v1: diameter 0.5, hole 0.3, Top Layer to Bottom Layer, tented both sides, 272 vias
v2: diameter 0.635, hole 0.508, Top Layer to Bottom Layer, tented both sides, 20 vias
v3: diameter 0.813, hole 0.406, Top Layer to Bottom Layer, 9 vias

## Nets (pads, with @x,y where several pads share a name; then routed paths per layer and width w, separated by ;. In a path a pad name is that pad's centre, name@x,y a point inside that pad or via, vN(x,y) a via of type N, cw(c..) or ccw(c..) an arc to the next point about the centre after c; other vN are vias at no path point)
3.3V: C1.2 C15.1 C17.1 C18.1 C20.2 C24.2 D1.1 D2.2 D9.1 J2.5 JP4.1 P1.1 P1.4 P2.4 P4.1 R1.1 R2.1 R3.1 R11.2 R28.1 R32.1 R64.1 R66.1 U1.5 U5.3 U6.64 U6.66 U7.5 | length 260.7
  Top Layer w0.254: 26.924,107.315 27.178,107.569 34.036,107.569 34.29,107.315 v1(34.29,105.918) ; 26.924,109.093 27.305,109.474 P2.4@28.321,109.474 ; 26.924,119.38 27.559,120.015 P1.1@28.321,120.015 31.623,120.015 32.131,119.507 32.131,117.602 32.512,117.221 D1.1@35.179,117.221 36.449,117.221 36.83,116.84 36.83,115.443 36.246,114.859 R11.2@36.246,113.665 ; P1.4@28.194,127.635 34.544,127.635 35.179,127 D2.2@35.179,125.603 ; R32.1@37.973,83.693 37.973,82.931 38.354,82.55 ; v1(38.1,125.603) 40.259,125.603 40.64,125.222 40.64,122.809 40.894,122.555 R1.1@43.186,122.555 ; R28.1@41.58,83.693 v2(43.561,83.693) ; R3.1@51.308,85.471 51.308,84.963 v1(51.689,84.582) ; v2(56.769,85.598) 57.074,85.293 R2.1@57.074,83.693 ; U6.64@60.702,99.874 62.155,99.874 62.357,100.076 62.357,101.219 ; U6.66@60.702,100.874 62.012,100.874 62.357,101.219 ; v1(66.802,101.219) 64.008,101.219 63.716,101.511 C20.2@63.716,101.981 62.865,101.981 62.357,101.473 62.357,101.219 ; v1@75.133,98.603 R64.1@75.133,99.695 ; v1@75.133,101.168 R66.1@75.133,102.235
  Top Layer w0.508: P1.4@28.194,127.635 26.924,126.365 26.924,119.38 26.924,109.093 26.924,107.315 26.924,82.931 27.305,82.55 v2(30.48,82.55) ; v2(35.433,82.55) 38.354,82.55 43.053,82.55 43.561,83.058 v2(43.561,83.693) ; U7.5@43.053,85.344 44.793,85.344 C24.2@45.085,85.636 v2(46.228,85.636) ; U1.5@58.801,85.344 60.414,85.344 C1.2@60.706,85.636 v2(61.938,85.636) ; U5.3@67.772,75.798 C18.1@67.772,77.47 C17.1@67.772,78.93 C15.1@67.772,80.391 67.772,81.026 ; v2(67.772,85.044) 67.772,81.026 ; v2(70.739,117.983) v2(70.739,105.918) 71.755,104.902 v2(71.755,101.219) v2(71.755,98.607) 71.755,82.169 71.374,81.788 ; v2(74.168,117.983) 80.073,117.983 P4.1@80.2,118.11 ; v2(75.692,105.918) 78.803,105.918 J2.5@80.2,107.315 ; JP4.1@77.343,73.74 74.215,73.74 73.66,74.295 73.66,81.026 72.898,81.788 71.374,81.788 ; 67.772,81.026 68.534,81.788 71.374,81.788
  Bottom Layer w0.254: v1(34.29,105.918) 38.818,105.918 D9.1@38.862,105.874 ; D2.2@35.179,125.603 v1(38.1,125.603) ; v1(51.689,84.582) 51.689,85.255 52.07,85.636 ; v1(66.802,101.219) v2(71.755,101.219) 71.802,101.172 v1(75.137,101.172) ; v2(71.755,98.607) v1(75.137,98.607)
  Bottom Layer w0.508: v2(30.48,82.55) v2(35.433,82.55) ; v2(43.561,83.693) 43.561,85.344 43.853,85.636 v2(46.228,85.636) 52.07,85.636 v2(61.938,85.636) 67.18,85.636 v2(67.772,85.044) ; v2(70.739,105.918) v2(75.692,105.918) ; v2(70.739,117.983) v2(74.168,117.983) ; P4.1@80.073,117.983 P4.1@80.2,118.11
3.6V: C10.1 L2.2 Q9.2 Q13.2 R33.1 R38.2 R39.1 R43.2 | length 40.6
  Top Layer w0.254: L2.2@48.447,54.042 L2.2@48.761,54.356
  Top Layer w0.508: Q9.2@46.68,70.047 46.609,69.976 R33.1@46.609,68.58 50.038,68.58 50.475,68.143 50.475,66.738 ; R43.2@47.574,46.609 47.574,53.169 L2.2@48.447,54.042 ; L2.2@48.761,54.356 48.761,63.31 C10.1@50.475,65.024 50.475,66.738 ; R39.1@54.483,69.977 54.413,70.047 Q13.2@52.258,70.047 52.258,68.521 51.098,67.361 ; R38.2@57.15,67.361 51.098,67.361 ; 50.475,66.738 51.098,67.361
3.6V_CHK: R38.1 R45.2 U6.73 | length 58.9
  Top Layer w0.254: R38.1@57.15,65.659 64.643,65.659 65.278,66.294 65.278,86.36 66.04,87.122 68.326,87.122 68.707,87.503 68.707,104.013 68.346,104.374 U6.73@60.702,104.374
  Top Layer w0.508: R45.2@57.15,63.754 R38.1@57.15,65.659
3.6V_CTL: R46.1 U6.51 | length 45
  Top Layer w0.254: U6.51@54.352,96.524 54.352,92.96 53.975,92.583 50.698,92.583 50.444,92.329 50.444,90.78 50.673,90.551 v1(55.118,90.551) ; v1(57.658,90.551) 63.5,90.551 64.262,89.789 64.262,71.247 63.69,70.675 R46.1@61.595,70.675
  Bottom Layer w0.254: v1(55.118,90.551) v1(57.658,90.551)
3.6V_I_CHK_CTR1: R14.2 U6.39 | length 37.6
  Top Layer w0.254: U6.39@47.502,98.874 41.597,98.874 41.275,98.552 41.275,93.218 41.783,92.71 48.006,92.71 48.387,92.329 48.387,82.423 v1(47.752,81.788) ; R14.2@53.086,81.788 v1(54.229,81.788)
  Bottom Layer w0.254: v1(47.752,81.788) v1(54.229,81.788)
3.6V_I_CHK_CTR2: R50.2 U6.38 | length 34.3
  Top Layer w0.254: R50.2@32.766,78.232 32.893,78.359 32.893,82.715 35.522,85.344 35.522,99.344 v1(35.56,99.382) ; v1(37.652,99.374) U6.38@47.502,99.374
  Bottom Layer w0.254: v1(35.56,99.382) 35.568,99.374 v1(37.652,99.374)
3.6V_Out: D6.2 Q5.2 R15.1 R22.2 R23.1 | length 9.7
  Top Layer w0.508: D6.2@54.208,74.422 57.15,74.422 57.51,74.782 R22.2@57.51,76.2 ; R15.1@59.055,77.978 58.744,77.667 Q5.2@57.51,77.667 R22.2@57.51,76.2 ; R23.1@59.182,76.2 R22.2@57.51,76.2
3.6V_Out1: J1.1 J1.3 Q5.3 R10.1 R15.2 | length 98.6
  Top Layer w0.508: J1.3@38.862,133.096 40.64,131.318 40.64,127.381 42.672,125.349 v2(45.085,125.349) ; Q5.3@56.56,80.067 58.668,80.067 R15.2@59.055,79.68 60.681,79.68 R10.1@60.706,79.654 61.366,79.654 61.722,80.01 v2(61.722,82.677) ; v2(65.278,125.349) 68.707,125.349 69.545,124.511 69.545,105.715 70.739,104.521 v2(70.739,82.677)
  Bottom Layer w0.508: J1.1@36.322,133.096 J1.3@38.862,133.096 ; v2(45.085,125.349) v2(65.278,125.349) ; v2(61.722,82.677) v2(70.739,82.677)
12V: C7.1 L1.2 Q15.2 Q17.2 R26.2 R31.2 R67.1 R80.1 | length 48
  Top Layer w0.508: R31.2@28.524,46.609 28.524,53.232 L1.2@29.648,54.356 C7.1@29.648,65.024 ; Q17.2@32.501,74.404 31.92,74.404 31.303,73.787 31.303,72.832 30.414,71.943 ; R67.1@34.468,70.043 34.468,71.272 R80.1@34.036,71.704 33.579,71.247 31.11,71.247 30.414,71.943 ; R26.2@36.703,67.488 32.112,67.488 C7.1@29.648,65.024 ; C7.1@29.648,65.024 28.067,65.024 27.432,65.659 27.432,71.501 27.874,71.943 Q15.2@28.759,71.943 30.414,71.943
12V_CHK: R26.1 R34.2 U6.70 | length 76.2
  Top Layer w0.254: R26.1@36.703,65.786 v1(38.862,65.786) ; v1(59.182,66.548) 64.135,66.548 64.77,67.183 64.77,86.868 65.659,87.757 67.818,87.757 68.199,88.138 68.199,102.489 67.814,102.874 U6.70@60.702,102.874
  Top Layer w0.508: R34.2@36.703,63.881 R26.1@36.703,65.786
  Bottom Layer w0.254: v1(38.862,65.786) 39.624,66.548 v1(59.182,66.548)
12V_CTL1: R69.1 U6.49 | length 35.7
  Top Layer w0.254: R69.1@42.926,69.332 42.926,70.612 43.307,70.993 47.371,70.993 48.387,72.009 48.387,80.875 49.454,81.941 49.454,93.015 50.038,93.599 53.086,93.599 53.352,93.865 U6.49@53.352,96.524
12V_CTL2: R82.1 U6.48 | length 33.8
  Top Layer w0.254: R82.1@42.596,71.882 43.561,71.882 44.018,71.425 47.192,71.425 47.955,72.188 47.955,81.054 48.895,81.993 48.895,93.067 49.859,94.031 52.502,94.031 52.852,94.381 U6.48@52.852,96.524
12V_Out1: D10.2 R35.1 | length 8.3
  Top Layer w0.508: D10.2@27.432,78.613 D10.2@27.432,78.994 27.432,79.756 27.94,80.264 30.353,80.264 31.369,81.28 R35.1@31.369,83.82
12V_Out2: D4.2 R52.1 | length 23.5
  Top Layer w0.508: D4.2@29.464,78.994 30.988,78.994 32.258,80.264 32.258,83.058 34.798,85.598 34.798,95.758 34.163,96.393 R52.1@31.42,96.393
ADC_DRV+: R70.1 R75.2 U6.58 | length 52.2
  Top Layer w0.254: v1(45.212,104.394) 45.212,110.49 46.609,111.887 46.609,123.952 47.244,124.587 48.768,124.587 49.098,124.917 R70.1@49.098,127.33 49.073,127.305 R75.2@47.498,127.305 ; v1(49.403,104.394) 49.403,106.553 49.784,106.934 57.404,106.934 57.852,106.486 U6.58@57.852,96.524
  Bottom Layer w0.254: v1(45.212,104.394) v1(49.403,104.394)
ADC_DRV-: R71.1 R74.2 U6.57 | length 52.5
  Top Layer w0.254: R74.2@42.418,127.305 44.408,127.305 44.433,127.33 45.449,127.33 45.974,126.805 45.974,112.141 44.45,110.617 v1(44.45,103.759) ; v1(50.292,103.759) 50.292,105.918 50.876,106.502 56.895,106.502 57.352,106.045 U6.57@57.352,96.524
  Bottom Layer w0.254: v1(44.45,103.759) v1(50.292,103.759)
Analog_A: J1.6 P3.1 | length 49.6
  Top Layer w0.254: J1.6@41.402,135.636 43.688,137.922 61.849,137.922 63.5,136.271 63.5,127.508 63.881,127.127 69.596,127.127 70.231,126.492 v1(70.993,126.492) ; v1(74.676,126.492) P3.1@80.2,126.492
  Bottom Layer w0.254: v1(70.993,126.492) v1(74.676,126.492)
Analog_B: J1.8 P3.2 | length 48.4
  Top Layer w0.254: J1.8@43.942,135.636 45.72,137.414 61.341,137.414 62.738,136.017 62.738,127 63.119,126.619 69.469,126.619 70.866,125.222 v1(71.374,125.222) ; v1(74.676,125.222) 74.676,124.206 74.93,123.952 P3.2@80.2,123.952
  Bottom Layer w0.254: v1(71.374,125.222) v1(74.676,125.222)
CLOSE: R40.1 U6.18 | length 27.8
  Top Layer w0.254: U6.18@50.352,109.724 50.352,111.633 50.733,112.014 52.959,112.014 53.34,112.395 53.34,114.935 53.594,115.189 56.261,115.189 56.769,115.697 56.769,123.698 56.007,124.46 51.816,124.46 51.333,124.943 R40.1@51.333,127.33
DRV+: J1.12 R70.2 | length 7.7
  Top Layer w0.254: J1.12@49.022,135.636 47.752,134.366 47.752,131.445 49.098,130.099 R70.2@49.098,129.032
DRV-: J1.10 R71.2 | length 7.4
  Top Layer w0.254: R71.2@44.628,129.032 45.212,129.616 45.212,134.366 J1.10@46.482,135.636
Ext_VCC: J1.7 Q1.2 R4.2 | length 28.6
  Top Layer w0.254: J1.7@43.942,133.096 42.672,134.366 38.1,134.366 37.719,133.985 37.719,132.207 38.1,131.826 39.116,131.826 39.624,131.318 39.624,126.238 39.827,126.035 40.843,126.035 41.148,125.73 41.148,123.952 41.529,123.571 v1(45.339,123.571) ; v1(47.371,123.571) R4.2@48.514,123.571 48.453,123.51 Q1.2@48.453,122.104
  Bottom Layer w0.254: v1(45.339,123.571) v1(47.371,123.571)
Ext_VCC_CHK: R6.2 R16.1 U6.76 | length 33.6
  Top Layer w0.254: R6.2@47.701,118.11 R16.1@47.701,116.459 47.701,114.859 48.006,114.554 v1(51.943,114.554) ; v1(59.055,114.554) 64.897,114.554 65.151,114.3 65.151,106.172 64.872,105.893 60.721,105.893 U6.76@60.702,105.874
  Bottom Layer w0.254: v1(51.943,114.554) v1(59.055,114.554)
Ext_VCC_CHK_CTR: R19.1 U6.36 | length 44.3
  Top Layer w0.254: v1@45.212,113.411 v1(45.085,113.411) 43.561,113.411 43.053,112.903 43.053,107.95 42.545,107.442 37.973,107.442 37.465,106.934 37.465,100.838 37.929,100.374 U6.36@47.502,100.374 ; v1(47.625,113.411) 52.451,113.411 52.705,113.665 52.705,118.999 53.086,119.38 R19.1@54.102,119.38
  Bottom Layer w0.254: v1(45.085,113.411) v1(47.625,113.411)